# EAGLE board UNIVERS2plus1 (EAGLE 6.4)
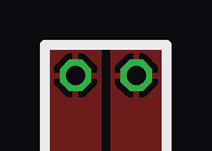
[diagram p0: board, top side]
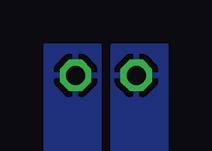
[diagram p1: board, bottom side, seen from below]

No outline drawn. Coordinates in mm, seen from the top.
Copper layers (1*16): Top 0.035mm / dielectric 1.5mm / Bottom 0.035mm
Design rules "default": minimum track width 10mil, minimum drill 0.6mm, track to track 8mil, track to pad 8mil, pad to pad 8mil, via to via 8mil, smd to smd 8mil, copper to edge 40mil, drill to drill 8mil, minimum pad ring 10mil, minimum via ring 8mil, stop-mask expansion 4mil, vias tented up to drill 0mil, thermal gap 10mil

## Footprints (pad centres in the part's own frame; a part is rotated, then mirrored left to right if it is on the bottom)
1 = drill 0.8 octagon: P$1 0,0

## Placement (x,y rotation side)
E$567  [1]  3.81,6.99 0 top
E$568  [1]  1.27,6.99 0 top

## Library data of the parts
E$567 E$568 = drill

## Nets
S$257: E$567.P$1
S$258: E$568.P$1

## Tracks (layer width: path | path; a pad name or v marks a point on that pad's centre or on a via)
S$1
  pour Bottom: 0,2.79 5.08,2.79 5.08,0.13 0,0.13
  pour Top: 0,2.79 5.08,2.79 5.08,0.13 0,0.13
S$257
  pour Top: 2.79,8.26 5.08,8.26 5.08,3.17 2.79,3.17
  pour Bottom: 2.79,8.26 5.08,8.26 5.08,3.17 2.79,3.17
S$258
  pour Top: 2.29,8.26 0,8.26 0,3.17 2.29,3.17
  pour Bottom: 0,8.26 2.29,8.26 2.29,3.17 0,3.17